# Allegro board F5438A_MINI_V10A.brd
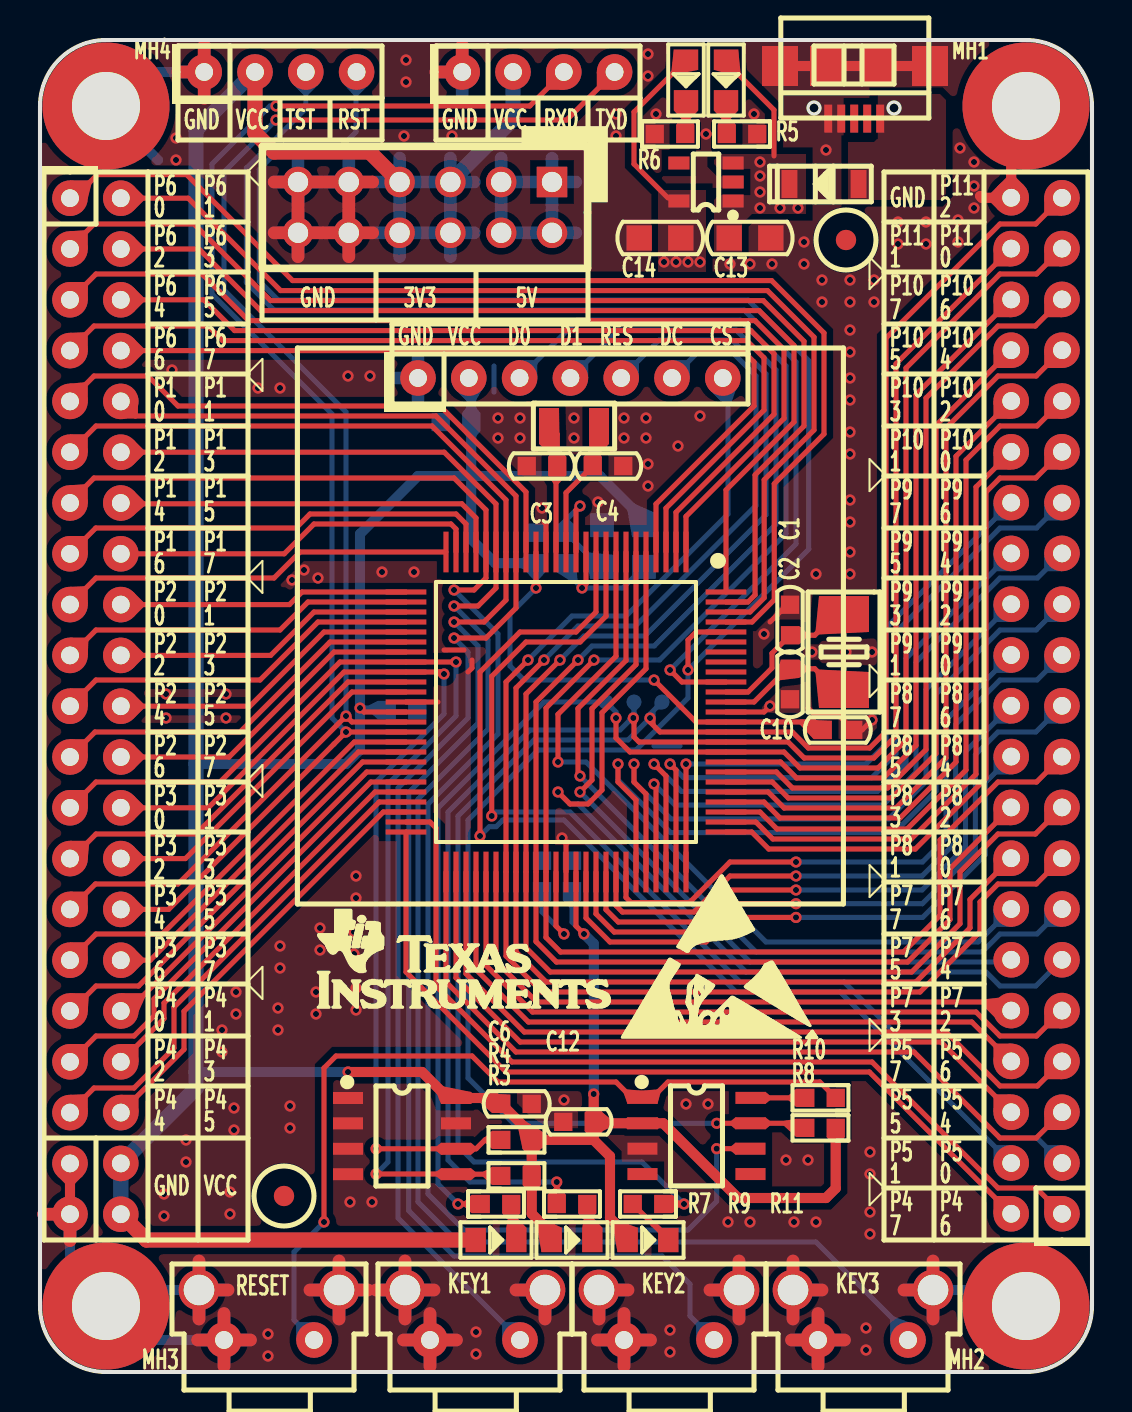
[diagram p0: board, top side]
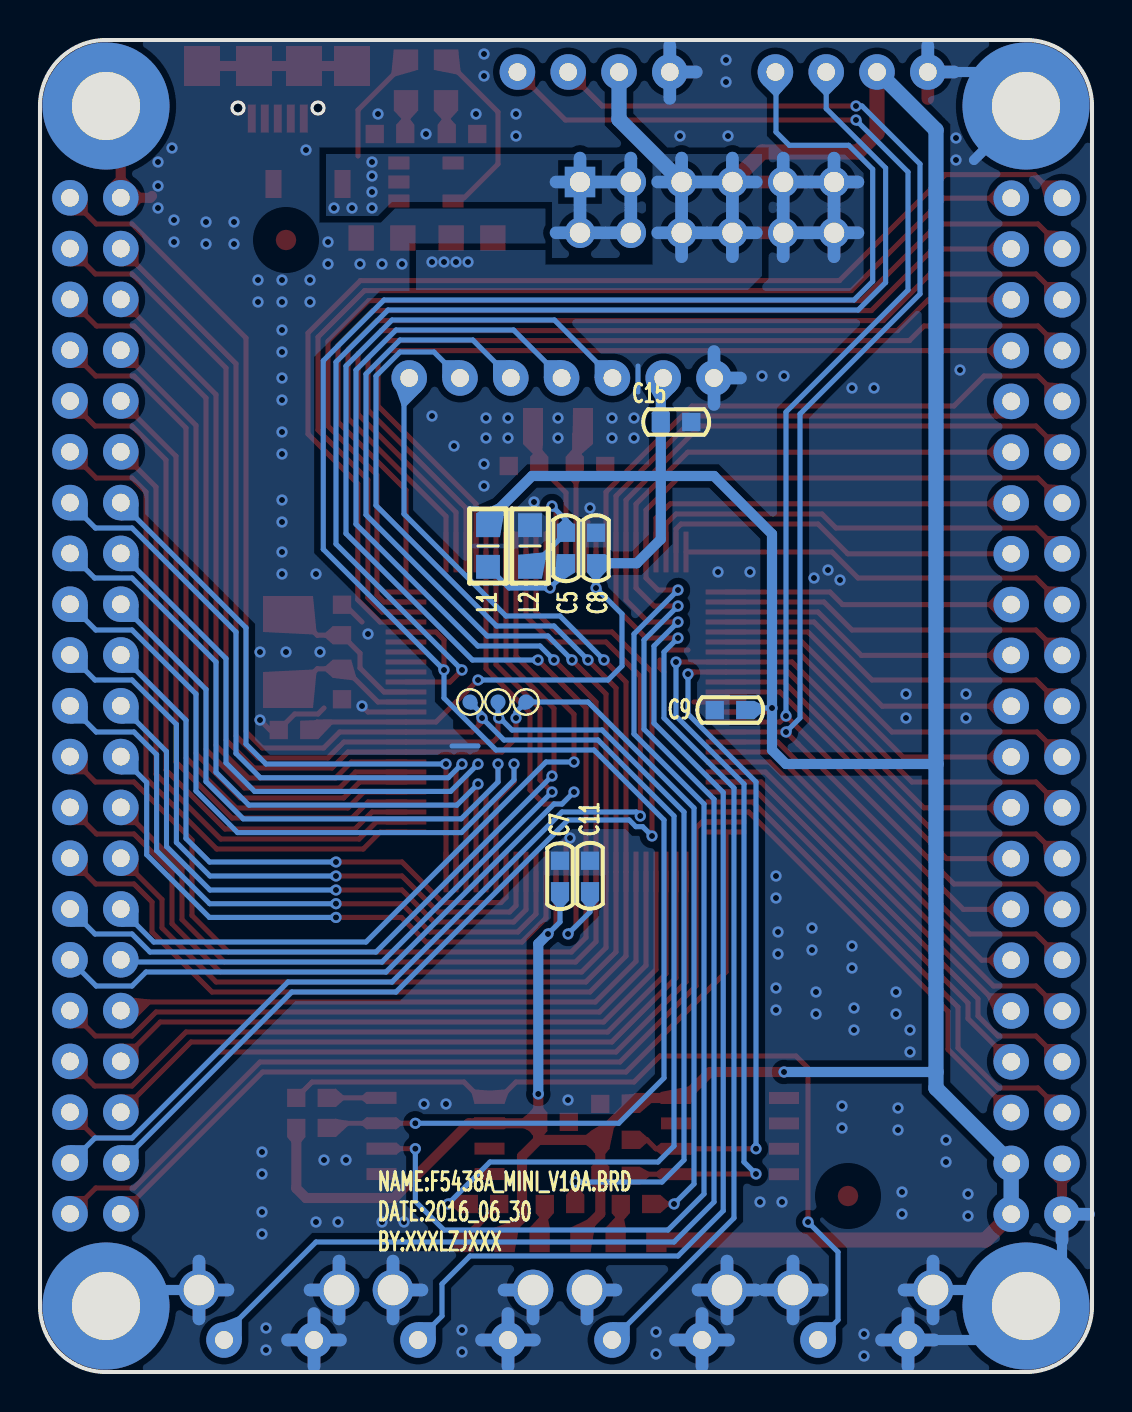
[diagram p1: board, bottom side, seen from below]

Outline 52.6 x 66.6 mm; copper layers: TOP, BOTTOM. Coordinates in mm from the lower left corner of the outline.
Outline path: 0,63.3 0,3.3 arc(0.97,0.97) 3.3,0 49.3,0 arc(51.63,0.97) 52.6,3.3 52.6,63.3 arc(51.63,65.63) 49.3,66.6 3.3,66.6 arc(0.97,65.63) 0,63.3

## Placement (name value [footprint] x y rotation side)
C1  20pF_50V  [CC0603]  37.5 37.6 90 top
C2  20pF_50V  [CC0603]  37.5 34.4 270 top
C3  12pF_50V  [CC0603]  25.1 45.3 180 top
C4  12pF_50V  [CC0603]  28.4 45.3 0 top
C5  0.1uF_50V  [CC0603]  26.3 41.2 270 bottom
C6  0.1uF_50V  [CC0603]  23.82 13.41 0 top
C7  0.1uF_50V  [CC0603]  25.1 24.8 90 bottom
C8  0.1uF_50V  [CC0603]  24.8 41.2 270 bottom
C9  0.1uF_50V  [CC0603]  18.1 33.1 180 bottom
C10  0.1uF_50V  [CC0603]  39.9 32.1 180 top
C11  0.1uF_50V  [CC0603]  26.6 24.8 270 bottom
C12  0.1uF_50V  [CC0603]  26.92 12.51 0 top
C13  10uF_25V  [CC0805]  35.5 56.7 180 top
C14  10uF_25V  [CC0805]  31 56.7 0 top
C15  0.1uF_50V  [CC0603]  20.8 47.5 180 bottom
D1  LED_RED  [LED0805]  34.3 64.6 270 top
D2  LED_RED  [LED0805]  32.3 64.6 270 top
D3  LED_RED  [LED0805]  22.8 6.6 0 top
D4  LED_RED  [LED0805]  26.6 6.6 0 top
D5  LED_RED  [LED0805]  30.4 6.6 0 top
D6  MBR0520_SOD123  [SOD123]  40.8 59.4 180 top
J3  CONN RCPT 6X2  [HEADER6X2]  25.6 59.5 180 top
J4  CONN RCPT 21x2  [HEADER21X2-2R54]  1.5 58.7 270 top
J5  CONN RCPT 21x2  [HEADER21X2-2R54]  51.1 7.9 90 top
JP2  SWD_smd  [HEADER4X1-2R54]  8.2 65 0 top
JP3  SWD_smd  [HEADER4X1-2R54]  21.1 65 0 top
L1  BEAD_BLM21PG600  [LC0805]  30.2 41.3 270 bottom
L2  BEAD_BLM21PG600  [LC0805]  28.1 41.3 270 bottom
MH1  Hold  [HOLD250D134]  49.3 63.3 0 top
MH2  Hold  [HOLD250D134]  49.3 3.3 0 top
MH3  Hold  [HOLD250D134]  3.3 3.3 0 top
MH4  Hold  [HOLD250D134]  3.3 63.3 0 top
MP1  MarkPoint  [MARKPOINT_R3]  12.2 8.8 0 top
MP2  MarkPoint  [MARKPOINT_R3]  40.3 56.6 0 top
NOREF  -  []  0 5 0 top
NOREF#2  -  []  4.2 0 90 top
NOREF#3  -  []  3.9 0 90 top
NOREF#4  -  []  0 3.8 0 top
NOREF#5  -  []  3.5 0 90 top
NOREF#6  -  []  0 4.6 0 top
NOREF#7  -  []  0 5 0 top
NOREF#8  -  []  0 6.8 0 top
NOREF#9  -  []  0 4.9 0 top
NOREF#10  -  []  0 3.6 0 top
NOREF#11  -  []  4.5 0 90 top
NOREF#12  -  []  4.2 0 90 top
R3  4.7K  [RC0603]  23.82 9.81 180 top
R4  4.7K  [RC0603]  23.82 11.61 180 top
R5  1.5K  [RC0603]  35.1 61.9 0 top
R6  1K  [RC0603]  31.5 61.9 180 top
R7  1K  [RC0603]  22.8 8.4 180 top
R8  10K  [RC0603]  39.02 12.21 0 top
R9  1K  [RC0603]  26.6 8.4 180 top
R10  0R/NI  [RC0603]  39.02 13.71 0 top
R11  1K  [RC0603]  30.4 8.4 0 top
SW1  KEY1  [SW-6X6X6-L]  19.5 1.6 0 top
SW2  KEY2  [SW-6X6X6-L]  29.2 1.6 0 top
SW3  RESET  [SW-6X6X6-L]  9.2 1.6 0 top
SW4  KEY3  [SW-6X6X6-L]  38.9 1.6 0 top
TP1  TestPoint  [TP-0R75]  31.1 33.5 180 bottom
TP2  TestPoint  [TP-0R75]  29.7 33.5 180 bottom
TP3  TestPoint  [TP-0R75]  28.3 33.5 180 bottom
U1  MSP430F5438AIPZ  [LQFP100]  26.3 33 270 top
U2  AT24C128  [SOIC8]  18.1 11.8 270 top
U3  SP706REN  [SOIC8]  32.82 11.81 270 top
U4  SPX3819M5-L-3-3/TR  [SOT23-5]  33.3 59.5 90 top
U5  -  [0R96-OLED-PACK]  18.9 49.7 0 top
USB1  -  [USB-MICRO]  40.7 62.6 180 top
X1  20MHz  [X-2P-5R0X3R2-SMD]  40.2 36 270 top
X2  32.768KHz  [X-2P-3R2X1R5-SMD]  26.7 47.3 0 top

## Library data of the parts
C1-C4 C6 C8-C15 = CAP NP
C5 C7 = CAP
D1-D5 = LED_4
D6 = D SCHOTTKY
J3 = CONN RCPT 6X2
J4 J5 = CONN RCPT 21x2
JP2 JP3 = HEADER 4_0
L1 L2 = INDUCTOR
MH1-MH4 = Hold_1
MP1 MP2 = MarkPoint
R3 R4 R8 R10 = R_10k_1
R5-R7 R9 R11 = R_10k_0603
SW1-SW4 = SWITCH-SPST-4P
TP1-TP3 = TestPoint
U1 = MSP430F5438A_0
U2 = AT24C512_0
U3 = SP706T_0
U4 = SPX3819M5-L-3-3/TR
U5 = 0R96-OLED-PACK
USB1 = USB-MICRO
X1 X2 = XTAL

## Footprints (pads in the part's own frame, mm; a bottom-side part is the same pattern mirrored in y, then rotated)
0R96-OLED-PACK
  round 1.778 hole 0.889: 1(0,0) 2(2.54,0) 3(5.08,0) 4(7.62,0) 5(10.16,0) 6(12.7,0) 7(15.24,0)
CC0603
  rect 0.914x0.914 smd: 1(-0.762,0) 2(0.762,0)
CC0805
  rect 1.27x1.27 smd: 1(-1.041,0) 2(1.041,0)
HEADER4X1-2R54
  round 1.778 hole 0.889: 1(0.01,0) 2(2.55,0) 3(5.09,0) 4(7.63,0)
HEADER6X2
  rect 1.524x1.524 hole 1.016: 1(0,0)
  round 1.524 hole 1.016: 2(0,2.54) 3(2.54,0) 4(2.54,2.54) 5(5.08,0) 6(5.08,2.54) 7(7.62,0) 8(7.62,2.54) 9(10.16,0) 10(10.16,2.54) 11(12.7,0) 12(12.7,2.54)
HEADER21X2-2R54
  round 1.778 hole 0.889: 1(0.01,0) 2(0.01,2.54) 3(2.55,0) 4(2.55,2.54) 5(5.09,0) 6(5.09,2.54) 7(7.63,0) 8(7.63,2.54) 9(10.17,0) 10(10.17,2.54) 11(12.71,0) 12(12.71,2.54) 13(15.25,0) 14(15.25,2.54) 15(17.79,0) 16(17.79,2.54) 17(20.33,0) 18(20.33,2.54) 19(22.87,0) 20(22.87,2.54) 21(25.41,0) 22(25.41,2.54) 23(27.95,0) 24(27.95,2.54) 25(30.49,0) 26(30.49,2.54) 27(33.03,0) 28(33.03,2.54) 29(35.57,0) 30(35.57,2.54) 31(38.11,0) 32(38.11,2.54) 33(40.65,0) 34(40.65,2.54) 35(43.19,0) 36(43.19,2.54) 37(45.73,0) 38(45.73,2.54) 39(48.27,0) 40(48.27,2.54) 41(50.81,0) 42(50.81,2.54)
HOLD250D134
  round 6.35 hole 3.404: 1(0,0)
LC0805
  rect 1.194x1.194 smd: 1(-1.041,0) 2(1.041,0)
LED0805
  rect 1.016x1.219 smd: 1(-1.016,0) 2(1.016,0)
LQFP100
  rect 2.032x0.254 smd: 1(-8,6) 2(-8,5.5) 3(-8,5) 4(-8,4.5) 5(-8,4) 6(-8,3.5) 7(-8,3) 8(-8,2.5) 9(-8,2) 10(-8,1.5) 11(-8,1) 12(-8,0.5) 13(-8,0) 14(-8,-0.5) 15(-8,-1) 16(-8,-1.5) 17(-8,-2) 18(-8,-2.5) 19(-8,-3) 20(-8,-3.5) 21(-8,-4) 22(-8,-4.5) 23(-8,-5) 24(-8,-5.5) 25(-8,-6) 51(8,-6) 52(8,-5.5) 53(8,-5) 54(8,-4.5) 55(8,-4) 56(8,-3.5) 57(8,-3) 58(8,-2.5) 59(8,-2) 60(8,-1.5) 61(8,-1) 62(8,-0.5) 63(8,0) 64(8,0.5) 65(8,1) 66(8,1.5) 67(8,2) 68(8,2.5) 69(8,3) 70(8,3.5) 71(8,4) 72(8,4.5) 73(8,5) 74(8,5.5) 75(8,6)
  rect 0.254x2.032 smd: 26(-6,-8) 27(-5.5,-8) 28(-5,-8) 29(-4.5,-8) 30(-4,-8) 31(-3.5,-8) 32(-3,-8) 33(-2.5,-8) 34(-2,-8) 35(-1.5,-8) 36(-1,-8) 37(-0.5,-8) 38(0,-8) 39(0.5,-8) 40(1,-8) 41(1.5,-8) 42(2,-8) 43(2.5,-8) 44(3,-8) 45(3.5,-8) 46(4,-8) 47(4.5,-8) 48(5,-8) 49(5.5,-8) 50(6,-8) 76(6,8) 77(5.5,8) 78(5,8) 79(4.5,8) 80(4,8) 81(3.5,8) 82(3,8) 83(2.5,8) 84(2,8) 85(1.5,8) 86(1,8) 87(0.5,8) 88(0,8) 89(-0.5,8) 90(-1,8) 91(-1.5,8) 92(-2,8) 93(-2.5,8) 94(-3,8) 95(-3.5,8) 96(-4,8) 97(-4.5,8) 98(-5,8) 99(-5.5,8) 100(-6,8)
MARKPOINT_R3
  round 1.016 smd: 1(0,0)
RC0603
  rect 0.914x0.914 smd: 1(-0.762,0) 2(0.762,0)
SOD123
  rect 0.8x1.4 smd: 1(-0.127,0) 2(3.327,0)
SOIC8
  rect 0.6x1.5 smd: 1(-1.9,-2.7) 2(-0.63,-2.7) 3(0.64,-2.7) 4(1.91,-2.7) 5(1.91,2.7) 6(0.64,2.7) 7(-0.63,2.7) 8(-1.9,2.7)
SOT23-5
  rect 0.65x1.06 smd: 1(-0.95,-1.354) 2(0,-1.354) 3(0.95,-1.354) 4(0.95,1.354) 5(-0.95,1.354)
SW-6X6X6-L
  round 2.032 hole 1.524: 1(-1.25,2.5) 4(5.75,2.5)
  round 1.778 hole 0.889: 2(0,0) 3(4.5,0)
TP-0R75
  round 0.75 smd: 1(0,0)
USB-MICRO
  rect 0.4x1.4 smd: 1(-1.31,-0.07) 2(-0.66,-0.07) 3(-0.01,-0.07) 4(0.64,-0.07) 5(1.29,-0.07)
  rect 1.8x2 smd: 6(-3.8,-2.7) 7(-1.2,-2.7) 8(1.3,-2.7) 9(3.7,-2.7)
X-2P-3R2X1R5-SMD
  rect 1x1.8 smd: 1(-1.25,0) 2(1.25,0)
X-2P-5R0X3R2-SMD
  rect 1.8x2.5 smd: 1(-1.9,0) 2(1.9,0)

## Nets
GND: C1.2 C2.2 C3.2 C4.2 C6.2 C7.2 C8.1 C9.1 C10.1 C11.1 C12.1 C13.1 C14.1 C15.2 J3.9(5) J3.10(11) J3.11(6) J3.12 J4.39 J4.41 J5.42 JP2.1 JP3.1 L2.1 MH1.1 MH2.1 MH3.1 MH4.1 R5.2 R6.2 SW1.1 SW1.2 SW1.4 SW2.1 SW2.2 SW2.4 SW3.1 SW3.2 SW3.4 SW4.1 SW4.2 SW4.4 U1.15(DVSS1_15) U1.37(DVSS3_37) U1.63(DVSS2_63) U1.88(DVSS4_88) U2.1(A0) U2.2(A1) U2.3(A2) U2.4(GND) U2.7(WP) U3.3(GND) U4.2(GND) U5.1(GND) USB1.4(ID) USB1.5(GND) USB1.6(P_2) USB1.7(P_1) USB1.8(P_3) USB1.9(P_4)
VCC_3V3: C6.1 C8.2 C9.2 C10.2 C11.2 C12.2 C14.2 C15.1 D2.1(ANODE) D3.1(ANODE) D4.1(ANODE) D5.1(ANODE) J3.5(3) J3.6(9) J3.7(4) J3.8(10) J4.40 J4.42 JP2.2 JP3.2 L1.1 R3.1 R4.1 R8.2 U1.16(DVCC1_16) U1.38(DVCC3_38) U1.64(DVCC2_64) U1.87(DVCC4_87) U2.8(VCC) U3.2(VCC) U4.5(VOUT) U5.2(VCC)
VCC_5V: C13.2 D1.1(ANODE) D6.2 J3.1 J3.2(7) J3.3(2) J3.4(8) U4.1(VIN) U4.3(EN)
I2C_SCL: J4.26 R4.2 U1.34(P3.1/UCB0SIMO/UCB0SDA) U2.6(SCL)
I2C_SDA: J4.25 R3.2 U1.33(P3.0/UCB0STE/UCA0CLK) U2.5(SDA)
JTAG_TCK: U1.95(PJ.3/TCK)
JTAG_TDI: U1.93(PJ.1/TDI/TCLK)
JTAG_TDO: U1.92(PJ.0/TDO)
JTAG_TEST: JP2.3 U1.91(TEST/SBWTCK)
JTAG_TMS: U1.94(PJ.2/TMS)
P1.0: J4.9 U1.17(P1.0/TA0CLK/ACLK)
P1.1: J4.10 SW1.3 U1.18(P1.1/TA0.0)
P1.2: J4.11 SW2.3 U1.19(P1.2/TA0.1)
P1.3: J4.12 SW4.3 U1.20(P1.3/TA0.2)
P1.4: J4.13 U1.21(P1.4/TA0.3) U3.6(WDI)
P1.5: J4.14 U1.22(P1.5/TA0.4)
P1.6: J4.15 U1.23(P1.6/SMCLK)
P1.7: J4.16 U1.24(P1.7)
P2.0: J4.17 U1.25(P2.0/TA1CLK/MCLK)
P2.1: J4.18 U1.26(P2.1/TA1.0)
P2.2: J4.19 U1.27(P2.2/TA1.1)
P2.3: J4.20 U1.28(P2.3/TA1.2)
P2.4: J4.21 U1.29(P2.4/RTCCLK)
P2.5: J4.22 U1.30(P2.5)
P2.6: J4.23 U1.31(P2.6/ACLK)
P2.7: J4.24 U1.32(P2.7/ADC12CLK/DMAE0)
P3.2: J4.27 U1.35(P3.2/UCB0SOMI/UCB0SCL)
P3.3: J4.28 U1.36(P3.3/UCB0CLK/UCA0STE)
P3.4: J4.29 JP3.4 U1.39(P3.4/UCA0TXD/UCA0SIMO)
P3.5: J4.30 JP3.3 U1.40(P3.5/UCA0RXD/UCA0SOMI)
P3.6: J4.31 U1.41(P3.6/UCB1STE/UCA1CLK)
P3.7: J4.32 U1.42(P3.7/UCB1SIMO/UCB1SDA)
P4.0: J4.33 U1.43(P4.0/TB0.0)
P4.1: J4.34 U1.44(P4.1/TB0.1)
P4.2: J4.35 U1.45(P4.2/TB0.2)
P4.3: J4.36 U1.46(P4.3/TB0.3)
P4.4: J4.37 U1.47(P4.4/TB0.4)
P4.5: J4.38 U1.48(P4.5/TB0.5)
P4.6: J5.1 U1.49(P4.6/TB0.6)
P4.7: J5.2 U1.50(P4.7/TB0CLK/SMCLK)
P5.0: J5.3 U1.9(P5.0/A8/VREF+/VEREF+)
P5.1: J5.4 U1.10(P5.1/A9/VREF-/VEREF-)
P5.2: C2.1 U1.89(P5.2/XT2IN) X1.2
P5.3: C1.1 U1.90(P5.3/XT2OUT) X1.1
P5.4: J5.5 U1.51(P5.4/UCB1SOMI/UCB1SCL)
P5.5: J5.6 U1.52(P5.5/UCB1CLK/UCA1STE)
P5.6: J5.7 U1.53(P5.6/UCA1TXD/UCA1SIMO)
P5.7: J5.8 U1.54(P5.7/UCA1RXD/UCA1SOMI)
P6.0: J4.1 U1.97(P6.0/A0)
P6.1: J4.2 U1.98(P6.1/A1)
P6.2: J4.3 U1.99(P6.2/A2)
P6.3: J4.4 U1.100(P6.3/A3)
P6.4: J4.5 U1.1(P6.4/A4)
P6.5: J4.6 U1.2(P6.5/A5)
P6.6: J4.7 U1.3(P6.6/A6)
P6.7: J4.8 U1.4(P6.7/A7)
P7.2: J5.9 U1.55(P7.2/TB0OUTH/SVMOUT)
P7.3: J5.10 U1.56(P7.3/TA1.2)
P7.4: J5.11 U1.5(P7.4/A12)
P7.5: J5.12 U1.6(P7.5/A13)
P7.6: J5.13 U1.7(P7.6/A14)
P7.7: J5.14 U1.8(P7.7/A15)
P8.0: J5.15 U1.57(P8.0/TA0.0) U5.7(CS)
P8.1: J5.16 U1.58(P8.1/TA0.1) U5.6(DC)
P8.2: J5.17 U1.59(P8.2/TA0.2) U5.5(RES)
P8.3: J5.18 U1.60(P8.3/TA0.3) U5.4(D1)
P8.4: J5.19 U1.61(P8.4/TA0.4) U5.3(D0)
P8.5: J5.20 U1.65(P8.5/TA1.0)
P8.6: J5.21 U1.66(P8.6/TA1.1)
P8.7: J5.22 U1.67(P8.7)
P9.0: J5.23 U1.68(P9.0/UCB2STE/UCA2CLK)
P9.1: J5.24 U1.69(P9.1/UCB2SIMO/UCB2SDA)
P9.2: J5.25 U1.70(P9.2/UCB2SOMI/UCB2SCL)
P9.3: J5.26 U1.71(P9.3/UCB2CLK/UCA2STE)
P9.4: J5.27 U1.72(P9.4/UCA2TXD/UCA2SIMO)
P9.5: J5.28 U1.73(P9.5/UCA2RXD/UCA2SOMI)
P9.6: J5.29 U1.74(P9.6)
P9.7: J5.30 U1.75(P9.7)
P10.0: J5.31 U1.76(P10.0/UCB3STE/UCA3CLK)
P10.1: J5.32 U1.77(P10.1/UCB3SIMO/UCB3SDA)
P10.2: J5.33 U1.78(P10.2/UCB3SOMI/UCB3SCL)
P10.3: J5.34 U1.79(P10.3/UCB3CLK/UCA3STE)
P10.4: J5.35 U1.80(P10.4/UCA3TXD/UCA3SIMO)
P10.5: J5.36 U1.81(P10.5/UCA3RXD/UCA3SOMI)
P10.6: J5.37 U1.82(P10.6)
P10.7: J5.38 U1.83(P10.7)
P11.0: J5.39 R7.2 TP3.1 U1.84(P11.0/ACLK)
P11.1: J5.40 R9.2 TP2.1 U1.85(P11.1/MCLK)
P11.2: J5.41 R11.2 TP1.1 U1.86(P11.2/SMCLK)
SYS_RESET#: JP2.4 R8.1 U1.96(RST/NMI/SBWTDIO) U3.7(R\S\T\)
XIN: C4.1 U1.13(P7.0/XIN) X2.2
XOUT: C3.1 U1.14(P7.1/XOUT) X2.1
N10945329: C7.1 U1.62(VCORE_62)
N10946051: C5.2 L1.2 U1.11(AVCC_11)
N10946055: C5.1 L2.2 U1.12(AVSS_12)
N11833384: R10.1 U3.8(W\D\O\)
N11833446: R10.2 SW3.3 U3.1(M\R\)
N12438988: D6.1 USB1.1(VBUS)
N118360131: D2.2(CATHODE) R6.1
N118360631: D3.2(CATHODE) R7.1
N118361011: D4.2(CATHODE) R9.1
N118361391: D5.2(CATHODE) R11.1
N124401661: D1.2(CATHODE) R5.1

Pads without a net: MP1 1; MP2 1; U3 4 5; U4 4; USB1 2 3

## Via types
v1: diameter 0.559, hole 0.305, TOP to BOTTOM, 198 vias

## Routing (per net, layer and track width the routed paths; a pad name or vN(x,y) marks a point on that pad's centre or on a via; arc(x,y) is an arc through that point)
GND: length 228
  TOP w0.254: 26.4,26.5 26.3,26.4 U1.63 ; 25.2,42.5 25.3,42.4 U1.15 ; 21.4,35 21.6,35.2 21.6,35.6 ; 21.2,36.1 20.2,36.1 ; v1(36.5,33.3) 36.2,33 U1.88 ; v1(41.6,32.6) 41.1,32.1 C10.1 39.86,32.9 38.7,32.9 38.4,33.2 ; C1.2 37.36,38.36 36.5,37.5 ; U1.37 19.9,33.5
  TOP w0.508: J4.39 J4.41 ; 47,58.8 47.09,58.71 J5.42 48.56,62.56 MH1.1 ; USB1.6 USB1.7 USB1.8 USB1.9
  TOP w0.635: J3.9 16.63,59.5 ; J3.9 15.44,58.31 ; J3.9 14.25,59.5 ; J3.10 16.63,56.96 ; J3.10 15.44,58.15 ; J3.10 15.44,55.77 ; J3.10 14.25,56.96 ; SW2.4 34.95,5.55 ; SW2.4 33.5,4.1 ; SW2.4 34.95,2.65 ; 19.79,65 JP3.1 21.11,66.32 ; 9.2,0.28 SW3.2 ; SW3.2 7.88,1.6 ; SW3.2 9.2,2.92 ; SW3.2 10.52,1.6 ; SW1.1 19.7,4.1 ; SW1.1 18.25,5.55 ; SW1.1 18.25,2.65 ; SW1.1 16.8,4.1 ; 8.21,63.68 JP2.1 ; JP2.1 6.89,65 ; JP2.1 8.21,66.32 ; SW2.2 30.52,1.6 ; SW2.2 29.2,2.92 ; SW2.2 27.88,1.6 ; SW2.2 29.2,0.28 ; 19.5,0.28 SW1.2 ; SW1.2 19.5,2.92 ; SW1.2 18.18,1.6 ; SW1.2 20.82,1.6 ; SW4.1 39.1,4.1 ; SW4.1 37.65,2.65 ; SW4.1 37.65,5.55 ; 1.5,6.57 J4.41 0.18,7.89 ; 23.8,4.1 SW1.4 25.25,2.65 ; 37.58,1.6 SW4.2 ; SW4.2 40.22,1.6 ; SW4.2 38.9,2.92 ; SW4.2 38.9,0.28 ; 11.71,59.5 J3.11 ; J3.11 14.09,59.5 ; J3.11 12.9,58.31 ; 7.95,2.65 SW3.1 ; SW3.1 7.95,5.55 ; SW3.1 9.4,4.1 ; SW3.4 14.95,5.55 ; SW3.4 16.4,4.1 ; SW3.4 13.5,4.1 ; SW3.4 14.95,2.65 ; 43.2,4.1 SW4.4 ; SW4.4 44.65,5.55 ; SW4.4 44.65,2.65 ; 27.95,2.65 SW2.1 29.4,4.1 ; J3.12 14.09,56.96 ; J3.12 12.9,58.15 ; J3.12 12.9,55.77 ; J3.12 11.71,56.96
  BOTTOM w0.254: 22.7,50.3 22.7,49 ; 30.7,31.3 32,31.3
  BOTTOM w0.508: MH3.1 5,1.6 7.88,1.6 ; MH3.1 1.5,5.1 1.5,6.57 ; MH3.1 4.1,4.1 SW3.1 ; SW4.4 48.5,4.1 MH2.1 ; 5.9,60.6 3.3,63.2 MH4.1 5,65 6.89,65
  BOTTOM w0.635: SW2.4 34.95,5.55 ; SW2.4 34.95,2.65 ; SW2.4 33.5,4.1 ; 7.88,1.6 SW3.2 ; SW3.2 9.2,0.28 ; SW3.2 10.52,1.6 ; SW3.2 9.2,2.92 ; 19.5,0.28 SW1.2 ; SW1.2 20.82,1.6 ; SW1.2 18.18,1.6 ; SW1.2 19.5,2.92 ; 14.25,59.5 J3.9 ; J3.9 15.44,60.69 ; J3.9 15.44,58.31 ; JP3.1 21.11,66.32 ; JP3.1 21.11,63.68 ; JP3.1 19.79,65 ; SW3.4 16.4,4.1 ; SW3.4 14.95,5.55 ; SW3.4 14.95,2.65 ; SW3.4 13.5,4.1 ; 11.71,56.96 J3.12 ; J3.12 12.9,58.15 ; J3.12 14.09,56.96 ; J3.12 12.9,55.77 ; 43.2,4.1 SW4.4 ; SW4.4 44.65,5.55 ; SW4.4 44.65,2.65 ; 12.9,58.31 J3.11 ; J3.11 14.09,59.5 ; J3.11 11.71,59.5 ; J3.11 12.9,60.69 ; SW2.2 29.2,2.92 ; SW2.2 27.88,1.6 ; SW2.2 30.52,1.6 ; SW2.2 29.2,0.28 ; SW4.1 39.1,4.1 ; SW4.1 37.65,5.55 ; SW4.1 37.65,2.65 ; 0.18,7.89 J4.41 1.5,6.57 ; 23.8,4.1 SW1.4 25.25,2.65 ; 8.21,66.32 JP2.1 6.89,65 ; 18.25,2.65 SW1.1 ; SW1.1 16.8,4.1 ; SW1.1 19.7,4.1 ; SW1.1 18.25,5.55 ; 17.58,49.7 U5.1 ; U5.1 18.9,51.02 ; U5.1 18.9,48.38 ; SW4.2 40.22,1.6 ; SW4.2 37.58,1.6 ; SW4.2 38.9,0.28 ; SW4.2 38.9,2.92 ; 27.95,2.65 SW2.1 29.4,4.1 ; SW3.1 7.95,5.55 ; SW3.1 7.95,2.65 ; SW3.1 9.4,4.1 ; 15.44,55.77 J3.10 ; J3.10 14.25,56.96 ; J3.10 15.44,58.15
  vias: v1(6.2,8.9) v1(6.2,7.8) v1(6.3,33.9) v1(6.3,32.7) v1(6.6,50.1) v1(6.8,61.7) v1(6.8,60.6) v1(7.3,11.6) v1(7.3,10.5) v1(9.1,17.1) v1(9.1,16) v1(9.3,33.9) v1(9.3,32.7) v1(9.5,9) v1(9.5,7.9) v1(9.7,13.2) v1(9.7,12.1) v1(9.8,19) v1(9.8,17.9) v1(10.9,49.2) v1(11.4,1.9) v1(11.4,0.8) v1(11.9,18.2) v1(11.9,17.1) v1(12,49.2) v1(12,21.3) v1(12,20.2) v1(12.5,13.3) v1(12.5,12.2) v1(12.6,39.6) v1(13.2,40.1) v1(13.8,19) v1(13.8,17.9) v1(13.9,39.7) v1(14,22.2) v1(14,21.1) v1(15.4,49.8) v1(15.5,8.5) v1(15.7,22) v1(15.7,20.9) v1(15.8,24.8) v1(15.8,23.7) v1(15.8,19.2) v1(15.8,18.1) v1(16.5,49.8) v1(16.6,8.5) v1(17.1,40) v1(18.2,61.8) v1(18.3,65.6) v1(18.3,64.5) v1(18.7,40) v1(20.6,61.8) v1(21.8,2) v1(21.8,0.9) v1(22.9,47.7) v1(22.9,46.7) v1(24,47.7) v1(24,46.7) v1(25.1,43.2) v1(26.1,26.7) v1(26.2,13.6) v1(26.7,47.7) v1(26.7,46.7) v1(27.9,43.5) v1(28.8,62.9) v1(28.8,61.8) v1(29.2,47.7) v1(29.2,46.7) v1(30.3,47.7) v1(30.3,46.7) v1(30.4,65.9) v1(30.4,64.8) v1(30.4,45.4) v1(30.4,44.3) v1(30.8,62.9) v1(31.5,2.1) v1(31.5,1) v1(31.9,46.3) v1(32.3,13.4) v1(33,47.8) v1(33.3,61.9) v1(33.4,13.4) v1(34.4,7.5) v1(34.5,55.4) v1(35.5,55.4) v1(35.5,7.5) v1(35.7,62.9) v1(36.2,36.9) v1(36.6,55.4) v1(37.3,10.6) v1(37.7,7.5) v1(38.2,56.5) v1(38.2,55.4) v1(38.4,10.6) v1(38.6,36) v1(38.8,39.9) v1(38.8,7.5) v1(39.1,54.6) v1(39.1,53.5) v1(39.3,61.1) v1(40.3,36) v1(40.5,54.6) v1(40.5,53.5) v1(40.5,52.1) v1(40.5,51) v1(40.5,49.7) v1(40.5,48.6) v1(40.5,47) v1(40.5,45.9) v1(40.5,43.6) v1(40.5,42.5) v1(40.5,41) v1(40.5,39.9) v1(41.3,2.2) v1(41.3,1.1) v1(41.5,11) v1(41.5,9.9) v1(41.5,8) v1(41.5,6.9) v1(41.6,36) v1(41.7,54.6) v1(41.7,53.5) v1(42.9,57.5) v1(42.9,56.4) v1(44.3,57.5) v1(44.3,56.4) v1(45.9,57.6) v1(45.9,56.5) v1(46,61.2) v1(46.7,60.5) v1(46.7,59.3) v1(46.7,58.2)
VCC_3V3: length 265.6
  TOP w0.254: v1(16,33.2) 16.2,33 U1.38 ; 31.4,58.7 29.7,60.4 29.7,63 32.3,65.6 D2.1 ; v1(30.7,34.6) 32.8,32.5 U1.87 38.74,32.5 C10.2 ; U1.64 26.8,22.3 v1(27.2,21.9) ; U1.16 v1(24.8,39.2)
  TOP w0.508: v1(15.4,15) 19.1,15 20.4,13.7 U2.8 22.77,13.7 C6.1 24.59,11.88 R4.1 ; C12.2 27.76,12.44 U3.2 31.16,12.44 34.9,8.7 39.3,8.7 39.79,9.19 R8.2 ; C12.2 v1(27.69,13.9) ; C12.2 27.69,11.6 ; D5.1 29.38,6.82 28.5,7.7 28.5,10.79 27.69,11.6 ; R4.1 R3.1 24.59,7.91 25.58,6.92 D4.1 ; R4.1 27.68,11.61 27.69,11.6
  TOP w0.762: J4.42 5.33,6.6 D3.1 ; J3.7 16.48,61 11.7,61 10.75,61.95 JP2.2
  BOTTOM w0.254: C8.2 v1(24.8,39.2) 23.5,37.9 23.5,35.3 24.2,34.6 v1(30.7,34.6) ; C11.2 26.6,22.5 v1(27.2,21.9) ; v1(16,33.2) 17.24,33.2 C9.2
  BOTTOM w0.508: 21.56,44.8 21.56,41.64 22.76,40.44 C8.2 ; 21.56,44.8 18.9,44.8 16,41.9 v1(16,33.2) 16,31.1 15.3,30.4 7.8,30.4 ; 21.56,44.8 C15.1 21.56,49.58 U5.2 ; 21.56,44.8 28,44.8 30.2,42.6 L1.1 ; v1(27.2,21.9) 27.69,21.41 v1(27.69,13.9) ; v1(15.4,15) 7.8,15
  BOTTOM w0.635: J3.8 19.17,56.96 ; J3.8 17.98,58.15 ; J3.8 17.98,55.77 ; J3.8 16.79,56.96 ; J3.5 20.52,60.69 ; J3.5 21.71,59.5 ; J3.5 20.52,58.31 ; J3.5 19.33,59.5 ; 17.98,58.31 J3.7 ; J3.7 16.79,59.5 ; J3.7 17.98,60.69 ; J3.7 19.17,59.5 ; J3.6 20.52,58.15 ; J3.6 20.52,55.77 ; J3.6 21.71,56.96 ; J3.6 19.33,56.96
  BOTTOM w0.762: JP2.2 10.7,65 7.8,62.1 7.8,14.19 J4.40 J4.42 ; JP3.2 23.65,62.63 J3.5
  vias: v1(31.2,55.5) v1(31.8,55.5) v1(32.4,55.5) v1(33,55.5)
VCC_5V: length 20.1
  TOP w0.254: 36.7,60.8 36.7,63.1 34.3,65.5 D1.1
  BOTTOM w0.635: 24.41,59.5 J3.1 ; J3.1 26.79,59.5 ; J3.1 25.6,58.31 ; J3.1 25.6,60.69 ; J3.3 24.25,59.5 ; J3.3 23.06,60.69 ; J3.3 23.06,58.31 ; J3.2 25.6,58.15 ; J3.2 24.41,56.96 ; J3.2 26.79,56.96 ; 24.25,56.96 J3.4 23.06,58.15
  vias: v1(36,60.5) v1(36,59.8) v1(36,59) v1(36,58.2) v1(37,58.2) v1(37.9,58.2)
I2C_SCL: length 50.6
  TOP w0.254: J4.26 8.41,28.21 15.2,35 U1.34 20,35 20.1,34.9 v1(20.2,34.9) ; R4.2 22.25,11.61 21.8,11.16 U2.6 v1(16.8,11.16)
  BOTTOM w0.254: v1(16.8,11.16) 16.8,29.5 20.2,32.9 v1(20.2,34.9)
I2C_SDA: length 55.9
  TOP w0.254: v1(16.8,9.9) 20.79,9.9 U2.5 22.98,9.89 R3.2 ; J4.25 1.51,28.21 2.8,29.5 9,29.5 15,35.5 U1.33 v1(20.8,35.5)
  BOTTOM w0.254: v1(20.8,35.5) 20.8,32.8 17.4,29.4 17.4,10.5 v1(16.8,9.9)
JTAG_TEST: length 61.9
  TOP w0.254: U1.91 32.1,34.5 v1(31.5,35.1)
  BOTTOM w0.254: JP2.3 13.29,63.17 10.32,60.2 10.32,54.47 11.69,53.1 35.2,53.1 37.8,50.5 37.8,41.4 v1(31.5,35.1)
P1.0: length 28.8
  TOP w0.254: U1.17 24.3,44 20,48.3 6.9,48.3 5.4,49.8 2.7,49.8 1.5,48.6 J4.9
P1.1: length 70.4
  TOP w0.254: v1(20.7,36.7) 22.3,36.7 23.8,38.2 U1.18 23.8,43.8 19.8,47.8 4.77,47.8 J4.10
  BOTTOM w0.254: SW1.3 17.9,7.7 17.9,29.2 21.4,32.7 21.4,36 v1(20.7,36.7)
P1.2: length 82.2
  TOP w0.254: v1(20.7,37.5) 22.2,37.5 23.3,38.6 U1.19 23.3,43.6 19.6,47.3 2.8,47.3 1.5,46 J4.11
  BOTTOM w0.254: v1(20.7,37.5) 21.9,36.3 21.9,32.44 18.44,28.98 18.44,8.06 20.7,5.8 31.1,5.8 32.5,4.4 32.5,2.8 SW2.3
P1.3: length 86
  TOP w0.254: v1(20.7,38.3) 21.9,38.3 22.8,39.2 U1.20 22.8,43.4 20.21,45.99 J4.12
  BOTTOM w0.254: SW4.3 43.4,1.9 38.8,6.5 20.9,6.5 18.9,8.5 18.9,28.64 22.4,32.14 22.4,36.6 v1(20.7,38.3)
P1.4: length 79.9
  TOP w0.254: U3.6 v1(33.83,11.17) ; v1(20.7,39.1) 21.7,39.1 22.3,39.7 U1.21 22.3,43.1 20.7,44.7 2.7,44.7 1.5,43.5 J4.13
  BOTTOM w0.254: v1(20.7,39.1) 22.9,36.9 22.9,31.9 19.4,28.4 19.4,8.9 21.2,7.1 32.4,7.1 33.83,8.53 v1(33.83,11.17)
P1.5: length 19.8
  TOP w0.254: J4.14 4.08,43.41 21.09,43.41 21.8,42.7 U1.22
P1.6: length 22.2
  TOP w0.254: U1.23 21.3,42.4 20.8,42.9 13.5,42.9 12.8,42.2 2.79,42.2 J4.15
P1.7: length 18.6
  TOP w0.254: J4.16 12.21,40.91 13.7,42.4 20.55,42.4 20.8,42.15 U1.24
P2.0: length 19.9
  TOP w0.254: J4.17 1.5,38.4 2.8,39.7 11.7,39.7 13,41 U1.25
P2.1: length 14.5
  TOP w0.254: U1.26 13.1,39 12.47,38.37 J4.18
P2.2: length 17.9
  TOP w0.254: J4.19 1.53,35.83 2.8,37.1 12,37.1 13.4,38.5 U1.27
P2.3: length 15.2
  TOP w0.254: J4.20 11.53,35.83 13.7,38 U1.28
P2.4: length 18.5
  TOP w0.254: J4.21 1.5,33.3 2.8,34.6 11,34.6 13.9,37.5 U1.29
P2.5: length 15.8
  TOP w0.254: U1.30 14.2,37 10.49,33.29 J4.22
P2.6: length 19.2
  TOP w0.254: J4.23 2.75,32 10,32 14.5,36.5 U1.31
P2.7: length 16.4
  TOP w0.254: J4.24 9.45,30.75 14.7,36 U1.32
P3.2: length 20.5
  TOP w0.254: U1.35 15.4,34.5 7.8,26.9 2.8,26.9 1.57,25.67 J4.27
P3.3: length 17.7
  TOP w0.254: J4.28 7.27,25.67 15.6,34 U1.36
P3.4: length 72.3
  TOP w0.254: J4.29 2.77,24.4 6.9,24.4 v1(15.3,32.8) 15.6,32.5 U1.39 ; JP3.4 26.33,62.6 v1(11.8,62.6)
  BOTTOM w0.254: v1(15.3,32.8) 15.3,48 9.2,54.1 9.2,60 v1(11.8,62.6)
P3.5: length 68.6
  TOP w0.254: JP3.3 24.49,63.3 v1(11.8,63.3) ; J4.30 6.43,23.13 14.7,31.4 v1(15.3,32) U1.40
  BOTTOM w0.254: v1(15.3,32) 14.6,32.7 14.6,47.9 8.6,53.9 8.6,60.4 11.5,63.3 v1(11.8,63.3)
P3.6: length 21.3
  TOP w0.254: U1.41 15.71,31.5 6.11,21.9 2.8,21.9 1.5,20.6 J4.31
P3.7: length 18.6
  TOP w0.254: U1.42 15.92,31 5.51,20.59 J4.32
P4.0: length 22
  TOP w0.254: J4.33 1.55,18.05 2.8,19.3 4.93,19.3 16.13,30.5 U1.43
P4.1: length 19.2
  TOP w0.254: J4.34 4.39,18.05 16.34,30 U1.44
P4.2: length 23.1
  TOP w0.254: U1.45 16.54,29.5 5.7,18.66 5.7,17.8 4.7,16.8 2.8,16.8 1.51,15.51 J4.35
P4.3: length 20.3
  TOP w0.254: J4.36 6.2,17.67 6.2,18.45 16.75,29 U1.46
P4.4: length 24.4
  TOP w0.254: U1.47 16.96,28.5 6.7,18.24 6.7,16.2 4.7,14.2 2.7,14.2 1.5,13 J4.37
P4.5: length 21.6
  TOP w0.254: U1.48 17.16,28 7.2,18.04 7.2,16.13 J4.38
P4.6: length 45.5
  TOP w0.254: U1.49 19.5,27.5 19.8,27.2 19.8,19.3 23.6,15.5 41.6,15.5 47.9,9.2 49.81,9.2 J5.1
P4.7: length 42.3
  TOP w0.254: J5.2 41.47,15 23.3,15 18.3,20 U1.50
P5.0: length 53
  TOP w0.254: v1(22.59,27.8) 22.59,34.79 24.3,36.5 27.01,36.5 28.3,37.79 U1.9
  BOTTOM w0.254: v1(22.59,27.8) 22.79,28 26.5,28 35,19.5 40.2,19.5 48,11.7 49.85,11.7 J5.3
P5.1: length 52.2
  TOP w0.254: U1.10 27.8,38 26.8,37 24,37 22,35 v1(22,26.8)
  BOTTOM w0.254: J5.4 40.01,19 34.8,19 26.2,27.6 23.14,27.6 22.81,27.27 22.47,27.27 v1(22,26.8)
P5.2: length 7
  TOP w0.254: U1.89 35.7,33.5 37.36,35.16 C2.1 38.74,35.16 39.8,34.1 X1.2
P5.3: length 7.9
  TOP w0.254: X1.1 39.8,37.9 38.74,36.84 C1.1 36.6,35.94 36.6,35.2 35.4,34 U1.90
P5.4: length 40.1
  TOP w0.254: J5.5 49.81,11.7 48,11.7 43.7,16 23.8,16 20.3,19.5 U1.51
P5.5: length 35.8
  TOP w0.254: J5.6 45.05,16.5 24.01,16.5 20.8,19.71 U1.52
P5.6: length 37.7
  TOP w0.254: J5.7 49.87,14.3 48,14.3 45.3,17 24.21,17 21.3,19.91 U1.53
P5.7: length 33.5
  TOP w0.254: J5.8 46.59,17.5 24.42,17.5 21.8,20.12 U1.54
P6.0: length 58.7
  TOP w0.254: J4.1 1.69,58.69 2.87,59.87 7.33,59.87 12.63,54.57 36.58,54.57 39.2,51.95 39.2,46.9 36.71,44.41 36.71,38.61 35.6,37.5 U1.97
P6.1: length 53.8
  TOP w0.254: U1.98 35.5,38 36.21,38.71 36.21,44.61 38.7,47.1 38.7,51.74 36.37,54.07 12.03,54.07 7.41,58.69 J4.2
P6.2: length 55
  TOP w0.254: U1.99 35.4,38.5 35.75,38.85 35.75,44.85 38.2,47.3 38.2,51.54 36.17,53.57 11.53,53.57 7.7,57.4 2.7,57.4 1.5,56.2 J4.3
P6.3: length 49.4
  TOP w0.254: U1.100 34.3,44.1 37.7,47.5 37.7,51.33 35.96,53.07 11.03,53.07 7.95,56.15 J4.4
P6.4: length 50
  TOP w0.254: U1.1 32.3,42.78 37.2,47.68 37.2,51.12 35.75,52.57 10.43,52.57 8.1,54.9 2.8,54.9 1.51,53.61 J4.5
P6.5: length 45.7
  TOP w0.254: J4.6 8.19,53.61 9.73,52.07 35.54,52.07 36.7,50.91 36.7,47.89 31.8,42.99 U1.2
P6.6: length 47.6
  TOP w0.254: U1.3 31.3,43.19 36.2,48.09 36.2,50.71 35.34,51.57 9.13,51.57 8.4,52.3 2.7,52.3 1.5,51.1 J4.7
P6.7: length 43.4
  TOP w0.254: J4.8 35.13,51.07 35.7,50.5 35.7,48.3 30.8,43.4 U1.4
P7.2: length 35.5
  TOP w0.254: U1.55 22.3,20.33 24.63,18 46.8,18 48,16.8 49.83,16.8 J5.9
P7.3: length 31.2
  TOP w0.254: J5.10 48.13,18.5 24.84,18.5 22.8,20.54 U1.56
P7.4: length 45.3
  TOP w0.254: U1.5 30.3,35.16 28.1,32.96 28.1,29.1 27.4,28.4 26.5,28.4 v1(25.9,29)
  BOTTOM w0.254: J5.11 49.79,19.3 48,19.3 47.3,20 35.3,20 26.9,28.4 26.5,28.4 v1(25.9,29)
P7.5: length 38.3
  TOP w0.254: v1(27,29) 27.6,29.6 27.6,33.17 29.8,35.37 U1.6
  BOTTOM w0.254: J5.12 48.45,20.5 35.5,20.5 v1(27,29)
P7.6: length 40.9
  TOP w0.254: v1(27,29.8) 26.9,29.9 26.9,33.18 29.3,35.58 U1.7
  BOTTOM w0.254: J5.13 49.85,21.9 48,21.9 47.1,21 35.8,21 v1(27,29.8)
P7.7: length 38.8
  TOP w0.254: v1(25.9,30.5) 25.9,32.89 28.8,35.79 U1.8
  BOTTOM w0.254: v1(25.9,30.5) 27.3,30.5 36.3,21.5 46.91,21.5 J5.14
P8.0: length 67.4
  TOP w0.254: J5.15 49.81,24.4 47.9,24.4 47,23.5 47,22 44,19 25.1,19 23.3,20.8 U1.57 23.3,34.5 v1(24.4,35.6)
  BOTTOM w0.254: U5.7 34.4,49.44 34.4,42.9 29.3,37.8 26.6,37.8 v1(24.4,35.6)
P8.1: length 69.5
  TOP w0.254: J5.16 46.5,23.63 46.5,22.21 43.79,19.5 25.31,19.5 23.8,21.01 U1.58 23.8,34.2 v1(25.2,35.6)
  BOTTOM w0.254: U5.6 32.9,51 34.6,51 35.8,49.8 35.8,43.33 29.77,37.3 26.9,37.3 v1(25.2,35.6)
P8.2: length 76.4
  TOP w0.254: J5.17 49.77,26.9 47.9,26.9 46,25 46,22.41 43.59,20 25.51,20 24.3,21.21 U1.59 24.3,33.9 v1(26,35.6)
  BOTTOM w0.254: U5.5 30.96,51.6 34.6,51.6 36.3,49.9 36.3,42.86 30.24,36.8 27.2,36.8 v1(26,35.6)
P8.3: length 76.4
  TOP w0.254: v1(26.9,35.6) 24.8,33.5 U1.60 24.8,21.52 25.82,20.5 43.38,20.5 45.5,22.62 45.5,25.17 J5.18
  BOTTOM w0.254: U5.4 28.92,52.1 34.8,52.1 36.8,50.1 36.8,42.39 30.71,36.3 27.6,36.3 v1(26.9,35.6)
P8.4: length 83.3
  TOP w0.254: v1(27.7,35.6) 25.3,33.2 U1.61 25.3,21.73 26.03,21 43.17,21 45,22.83 45,26.6 47.9,29.5 49.83,29.5 J5.19
  BOTTOM w0.254: v1(27.7,35.6) 30.98,35.6 37.3,41.92 37.3,50.3 35,52.6 26.88,52.6 U5.3
P8.5: length 30
  TOP w0.254: v1(37.8,22.73) 34.53,22.73 33.3,21.5 28.5,21.5 27.3,22.7 U1.65
  BOTTOM w0.254: v1(37.8,22.73) 44.13,22.73 47.27,25.87 47.27,29.48 J5.20
P8.6: length 33.3
  TOP w0.254: v1(37.8,23.41) 34.51,23.41 33.1,22 28.71,22 27.8,22.91 U1.66
  BOTTOM w0.254: J5.21 49.79,32 47.9,32 46.77,30.87 46.77,26.07 44.11,23.41 v1(37.8,23.41)
P8.7: length 29.7
  TOP w0.254: v1(37.8,24.1) 34.5,24.1 32.9,22.5 28.91,22.5 28.3,23.11 U1.67
  BOTTOM w0.254: v1(37.8,24.1) 44.1,24.1 46.28,26.28 46.28,31.03 J5.22
P9.0: length 32.9
  TOP w0.254: U1.68 28.8,23.32 29.12,23 32.7,23 34.5,24.8 v1(37.8,24.8)
  BOTTOM w0.254: v1(37.8,24.8) 44.1,24.8 45.78,26.48 45.78,32.38 48,34.6 49.85,34.6 J5.23
P9.1: length 29.2
  TOP w0.254: v1(37.8,25.5) 34.5,25.5 32.47,23.47 29.55,23.47 29.3,23.73 U1.69
  BOTTOM w0.254: J5.24 45.3,32.59 45.3,26.68 44.12,25.5 v1(37.8,25.5)
P9.2: length 37.4
  TOP w0.254: U1.70 29.8,28.6 28.9,29.5 v1(28.9,30.4)
  BOTTOM w0.254: v1(28.9,30.4) 28.9,29.6 31.53,26.97 42.72,26.97 44.8,29.05 44.8,33.9 48,37.1 49.81,37.1 J5.25
P9.3: length 33.3
  TOP w0.254: v1(29.7,30.4) 29.7,29.5 30.3,28.9 U1.71
  BOTTOM w0.254: v1(29.7,30.4) 29.7,29.5 31.54,27.66 42.44,27.66 44.3,29.52 44.3,34.13 J5.26
P9.4: length 33.7
  TOP w0.254: v1(30.7,29.4) 30.8,29.3 U1.72
  BOTTOM w0.254: J5.27 49.87,39.7 48,39.7 43.8,35.5 43.8,29.99 42.15,28.34 31.76,28.34 v1(30.7,29.4)
P9.5: length 32.1
  TOP w0.254: U1.73 31.3,29.8 v1(30.7,30.4)
  BOTTOM w0.254: v1(30.7,30.4) 32.07,29.03 41.87,29.03 43.3,30.46 43.3,35.67 J5.28
P9.6: length 34.7
  TOP w0.254: v1(31.5,30.4) 31.8,30.1 U1.74
  BOTTOM w0.254: v1(31.5,30.4) 32.19,29.71 41.58,29.71 42.8,30.93 42.8,37 48,42.2 49.83,42.2 J5.29
P9.7: length 30.5
  TOP w0.254: v1(32.3,30.4) U1.75
  BOTTOM w0.254: J5.30 42.3,37.21 42.3,31.4 41.3,30.4 v1(32.3,30.4)
P10.0: length 33.8
  TOP w0.254: J5.31 49.79,44.7 48,44.7 47.3,44 47.3,29.69 43.76,26.15 36.44,26.15 35.59,27 U1.76
P10.1: length 31
  TOP w0.254: U1.77 35.79,27.5 36.64,26.65 43.56,26.65 46.8,29.89 46.8,44.25 J5.32
P10.2: length 35.1
  TOP w0.254: J5.33 49.85,47.3 48,47.3 46.3,45.6 46.3,30.1 43.35,27.15 36.85,27.15 36,28 U1.78
P10.3: length 32.2
  TOP w0.254: J5.34 45.8,45.79 45.8,30.5 43,27.7 37,27.7 36.2,28.5 U1.79
P10.4: length 36.3
  TOP w0.254: J5.35 49.81,49.8 47.9,49.8 45.3,47.2 45.3,30.71 42.79,28.2 37.21,28.2 36.41,29 U1.80
P10.5: length 33.5
  TOP w0.254: J5.36 44.8,47.33 44.8,30.91 42.59,28.7 37.41,28.7 36.61,29.5 U1.81
P10.6: length 37.5
  TOP w0.254: U1.82 36.82,30 37.62,29.2 42.38,29.2 44.3,31.12 44.3,48.7 47.9,52.3 49.77,52.3 J5.37
P10.7: length 34.8
  TOP w0.254: U1.83 37.03,30.5 37.83,29.7 42.17,29.7 43.8,31.33 43.8,48.87 J5.38
P11.0: length 78.5
  TOP w0.254: v1(28.8,32.7) 28.8,31.7 29.5,31 U1.84 37.2,31 38,30.2 41.9,30.2 43.3,31.6 43.3,50.2 48,54.9 49.83,54.9 J5.39 ; R7.2 v1(20.9,8.4)
  BOTTOM w0.254: v1(28.8,32.7) 28.8,33 TP3.1 25.2,33.5 19.9,28.2 19.9,9.4 v1(20.9,8.4)
P11.1: length 78.1
  TOP w0.254: v1(29.67,32.7) 29.7,32.67 29.7,31.75 29.95,31.5 U1.85 37.41,31.5 38.21,30.7 41.69,30.7 42.8,31.81 42.8,50.41 J5.40 ; R9.2 v1(25.84,9.5)
  BOTTOM w0.254: v1(25.84,9.5) 21.5,9.5 20.4,10.6 20.4,28 24.5,32.1 29,32.1 29.6,32.7 29.66,32.7 v1(29.67,32.7) 29.7,32.74 TP2.1
P11.2: length 87
  TOP w0.254: J5.41 49.79,57.4 48,57.4 42.3,51.7 42.3,32.01 41.49,31.2 38.41,31.2 37.61,32 U1.86 31,32 30.5,32.5 v1(30.5,32.7) ; R11.2 v1(32.2,8.4)
  BOTTOM w0.254: v1(32.2,8.4) 30.1,10.5 21.7,10.5 20.9,11.3 20.9,27.8 24.7,31.6 29.4,31.6 v1(30.5,32.7) 30.5,32.9 TP1.1
SYS_RESET#: length 110.6
  TOP w0.254: v1(32.4,35.1) 32.4,36.6 32.8,37 U1.96 ; R8.1 38.03,12.44 U3.7 v1(33.84,12.44)
  BOTTOM w0.254: v1(33.84,12.44) 23.66,12.44 21.4,14.7 21.4,27.6 24.9,31.1 29.8,31.1 32.4,33.7 v1(32.4,35.1) 38.44,41.14 38.44,50.56 35.4,53.6 11.9,53.6 10.97,54.53 10.97,60.14 12.17,61.34 15.14,61.34 15.8,62 15.8,64.97 JP2.4
XIN: length 7
  TOP w0.254: X2.2 27.64,46.99 C4.1 26.3,43.96 U1.13
XOUT: length 6.5
  TOP w0.254: X2.1 25.86,46.89 C3.1 25.8,45.24 U1.14
N10945329: length 5.9
  TOP w0.254: v1(26.2,21.9) 25.8,22.3 U1.62
  BOTTOM w0.254: C7.1 25.1,23 v1(26.2,21.9)
N10946051: length 7
  TOP w0.254: v1(27.1,39.2) 27.3,39.4 U1.11
  BOTTOM w0.254: L1.2 29.14,39.2 v1(27.1,39.2) 26.3,40 C5.2
N10946055: length 6.5
  TOP w0.254: U1.12 26.8,43.1 v1(27,43.3)
  BOTTOM w0.254: L2.2 28,40.26 C5.1 26.3,42.6 v1(27,43.3)
N11833384: length 2.7
  TOP w0.254: U3.8 R10.1
N11833446: length 42
  TOP w0.254: R10.2 38.99,14.5 31.4,14.5 30.61,13.71 U3.1 29.59,13.71 28.8,14.5 22.9,14.5 21.6,15.8 14.8,15.8 14.2,15.2 v1(14.2,7.5)
  BOTTOM w0.254: v1(14.2,7.5) 12.7,6 12.7,2.6 SW3.3
N118360131: length 1.7
  TOP w0.254: D2.2 32.3,61.94 R6.1
N118360631: length 1.9
  TOP w0.254: R7.1 23.56,6.85 D3.2
N118361011: length 1.9
  TOP w0.254: R9.1 27.36,6.85 D4.2
N118361391: length 3.7
  TOP w0.254: 31.42,6.62 30.65,7.39 ; 31.42,6.62 31.42,6.7 30.73,7.39 30.65,7.39 ; 31.42,6.62 D5.2 ; 30.65,7.39 R11.1
N124401661: length 1.7
  TOP w0.254: D1.2 34.3,61.94 R5.1

## Copper pours and planes (outline as drawn; the poured copper is in the pictures)
GND on BOTTOM: 0,63.3 3.3,66.6 49.3,66.6 52.6,63.3 52.6,3.3 49.3,0 3.3,0 0,3.3 ; 55 cut-outs
VCC_3V3 on TOP (solid shape): 32.32,65.64 32.91,65.11 31.7,64.86 31.61,64.9 31.56,64.99 31.69,66.12
VCC_3V3 on TOP (solid shape): 28.62,7.32 28.71,7.51 28.9,7.58 29.89,7.21 29.42,6.55 28.88,5.99
VCC_3V3 on TOP (solid shape): 24.82,7.42 24.92,7.62 25.13,7.67 26.09,7.21 25.62,6.55 25.08,5.99
VCC_3V3 on BOTTOM (solid shape): 29.35,43.2 29.44,43.39 29.66,43.45 30.8,42.94 30.24,42.29 29.6,41.74
VCC_3V3 on TOP: 30.9,59.1 30.9,55 33.3,55 33.3,59.1
VCC_3V3 on BOTTOM: 33.8,56.1 22,56.1 22,60.9 16.5,60.9 16.5,54.8 17.2,54.1 33.8,54.1
VCC_5V on TOP (solid shape): 35.04,64.89 34.99,64.79 34.89,64.77 33.69,65.11 34.28,65.64 34.91,66.12
VCC_5V on TOP: 34,60.9 38.3,60.9 38.3,57.9 35.6,57.9 35.1,57.4 35.1,56 33.7,56 33.7,58.6 34,58.9 35.5,58.9 35.5,60.1 34,60.1 33.7,60.4 33.7,60.6
VCC_5V on BOTTOM: 22.3,55.7 27,55.7 27,58.5 35,58.5 35.7,57.8 38.3,57.8 38.3,60.9 22.3,60.9
(no net) on TOP: 0,63.3 3.3,66.6 49.3,66.6 52.6,63.3 52.6,3.3 49.3,0 3.3,0 0,3.3 ; 68 cut-outs
P5.2 on TOP (solid shape): 41.45,35 40.23,34.08 38.95,33.2 38.77,35 38.81,35.09 38.9,35.13
P5.3 on TOP (solid shape): 40.23,37.92 41.45,37 38.9,36.87 38.81,36.91 38.77,37 38.95,38.8
XOUT on TOP (solid shape): 25.99,45.76 25.92,45.65 25.79,45.66 24.95,46.4 25.42,47.42 25.95,48.2
N10946055 on BOTTOM (solid shape): 28.7,40.86 28.12,40.24 27.5,39.66 27.28,40.85 27.31,40.94 27.41,40.98
N12438988 on TOP: 41.8,63.9 41.8,61.6 41.7,61.5 40.4,61.5 40.4,58.6 45,58.6 45.3,58.9 45.3,63.6 45,63.9
GND on TOP (solid shape): 2.13,9.8 1.68,9.35 1.5,9.28 1.32,9.35 0.87,9.8 1.5,10.49
GND on TOP (solid shape): 48.38,59.79 48.56,59.86 48.74,59.79 49.19,59.34 48.56,58.65 47.93,59.34
GND on TOP (solid shape): 48.62,58.71 47.93,58.08 47.48,58.53 47.41,58.71 47.48,58.89 47.93,59.34
VCC_3V3 on TOP (solid shape): 19.8,14.05 19.87,14.23 20.06,14.3 21.55,14 21.03,13.59 20.05,13.4
VCC_3V3 on TOP (solid shape): 39.6,32.56 39.17,32.09 38.68,31.64 37.94,32.42 37.93,32.56 38.04,32.63
VCC_3V3 on TOP (solid shape): 23.88,12.34 23.98,12.54 24.2,12.58 25.04,12.06 24.62,11.55 24.13,11.15
VCC_3V3 on TOP (solid shape): 23.52,13.86 23.12,13.39 22.61,12.95 21.9,13.56 21.88,13.81 22.08,13.95
VCC_3V3 on BOTTOM (solid shape): 22.11,49.12 21.78,48.55 21.6,48.43 21.38,48.5 20.81,49.07 21.43,49.76
I2C_SCL on TOP (solid shape): 5.21,28.3 5.24,28.21 5.21,28.12 4.67,27.58 4.01,28.21 4.67,28.84
JTAG_TEST on BOTTOM (solid shape): 13.92,64.37 13.38,63.83 13.29,63.8 13.2,63.83 12.66,64.37 13.29,65.03
P1.3 on TOP (solid shape): 5.21,46.08 5.24,45.99 5.21,45.9 4.67,45.36 4.01,45.99 4.67,46.62
P1.3 on BOTTOM (solid shape): 42.51,2.66 42.57,2.77 42.68,2.78 43.45,2.48 43.42,1.57 42.51,1.6
P1.5 on TOP (solid shape): 5.25,43.5 5.28,43.41 5.24,43.31 4.66,42.82 4.01,43.45 4.67,44.08
P2.1 on TOP (solid shape): 5.21,38.46 5.24,38.37 5.21,38.28 4.67,37.74 4.01,38.37 4.67,39
P2.3 on TOP (solid shape): 5.21,35.92 5.24,35.83 5.21,35.74 4.67,35.2 4.01,35.83 4.67,36.46
P2.5 on TOP (solid shape): 5.21,33.38 5.24,33.29 5.21,33.2 4.67,32.66 4.01,33.29 4.67,33.92
P2.7 on TOP (solid shape): 5.21,30.84 5.24,30.75 5.21,30.66 4.67,30.12 4.01,30.75 4.67,31.38
P3.3 on TOP (solid shape): 5.21,25.76 5.24,25.67 5.21,25.58 4.67,25.04 4.01,25.67 4.67,26.3
P3.5 on TOP (solid shape): 5.21,23.22 5.24,23.13 5.21,23.04 4.67,22.5 4.01,23.13 4.67,23.76
P3.7 on TOP (solid shape): 5.21,20.68 5.24,20.59 5.21,20.5 4.67,19.96 4.01,20.59 4.67,21.22
P4.1 on TOP (solid shape): 5.15,18.94 5.25,18.88 5.26,18.76 4.92,18 4.01,18.03 4.04,18.94
P5.2 on TOP (solid shape): 37.53,35.18 37.96,34.7 36.9,34.58 36.81,34.62 36.78,34.72 37.04,35.62
P6.0 on TOP (solid shape): 2.45,59.58 2.55,59.53 2.58,59.42 2.39,58.66 1.48,58.67 1.5,59.58
P6.1 on TOP (solid shape): 5.21,58.78 5.24,58.69 5.21,58.6 4.67,58.06 4.01,58.69 4.67,59.32
P6.3 on TOP (solid shape): 5.21,56.24 5.24,56.15 5.21,56.06 4.67,55.52 4.01,56.15 4.67,56.78
P6.5 on TOP (solid shape): 5.21,53.7 5.24,53.61 5.21,53.52 4.67,52.98 4.01,53.61 4.67,54.24
P6.7 on TOP (solid shape): 5.21,51.16 5.24,51.07 5.21,50.98 4.67,50.44 4.01,51.07 4.67,51.7
P7.3 on TOP (solid shape): 48.59,18.06 47.93,17.54 47.06,18.41 47.03,18.54 47.13,18.63 48.01,18.72
P8.0 on BOTTOM (solid shape): 34.8,49.12 34.52,48.32 34.43,48.24 34.31,48.27 33.51,49.07 34.13,49.73
SYS_RESET# on TOP (solid shape): 38.29,12.2 37.8,11.75 37.15,12.36 37.12,12.47 37.2,12.55 37.8,12.66
SYS_RESET# on BOTTOM (solid shape): 16.46,64.37 15.89,63.8 15.8,63.77 15.71,63.81 15.2,64.38 15.83,65.03
XIN on TOP (solid shape): 28.45,46.4 27.72,45.66 27.6,45.64 27.52,45.73 27.45,46.4 27.96,47.33
N10946051 on BOTTOM (solid shape): 26.88,39.54 26.82,39.44 26.7,39.43 25.84,39.98 26.29,40.47 26.76,40.9
N11833446 on TOP (solid shape): 30.91,14.13 31,14.09 31.03,14 30.87,13.41 30.01,13.66 29.37,14.01
N11833446 on TOP (solid shape): 30.87,14.01 30.24,13.66 29.37,13.41 29.17,13.99 29.2,14.09 29.29,14.13
N118360131 on TOP (solid shape): 32.91,63.08 32.38,62.49 32.3,62.47 32.22,62.49 31.69,63.08 32.3,63.62
N118360631 on TOP (solid shape): 23.44,7.89 23.53,7.97 23.64,7.94 24.32,7.21 23.82,6.57 23.31,7.21
N118361011 on TOP (solid shape): 27.24,7.89 27.33,7.97 27.44,7.94 28.12,7.21 27.62,6.57 27.11,7.21
N124401661 on TOP (solid shape): 34.91,63.08 34.38,62.49 34.3,62.47 34.22,62.49 33.69,63.08 34.3,63.62

Small or netless copper shapes (teardrops, artwork), in the pictures only: 125 on TOP, 79 on BOTTOM

## Text on the board
Ref Des/Silkscreen Bottom: NAME:F5438A_MINI_V10A.BRD | DATE:2016_06_30 | BY:XXXLZJXXX
Ref Des/Silkscreen Top: P6 | 0 | 2 | 4 | 6 | P1 | P2 | P3 | P4 | GND | 1 | 3 | 5 | 7 | VCC | RESET | TST | RST | 3V3 | KEY1 | D0 | 5V | RXD | D1 | TXD | RES | KEY2 | DC | CS | KEY3 | P11 | P10 | P9 | P8 | P7 | P5
DIMENSION: FIGURE | SIZE | 0.3048 | 0.889 | 1.016 | 1.524 | 3.4036 | DRILL CHART: TOP to BOTTOM | ALL UNITS ARE IN MILLIMETERS | PLATED | QTY | 198 | 107 | 1 | 11 | 8 | 4
